# EAGLE board ONLY_HBRIDGE v9 (EAGLE 9.6.2)
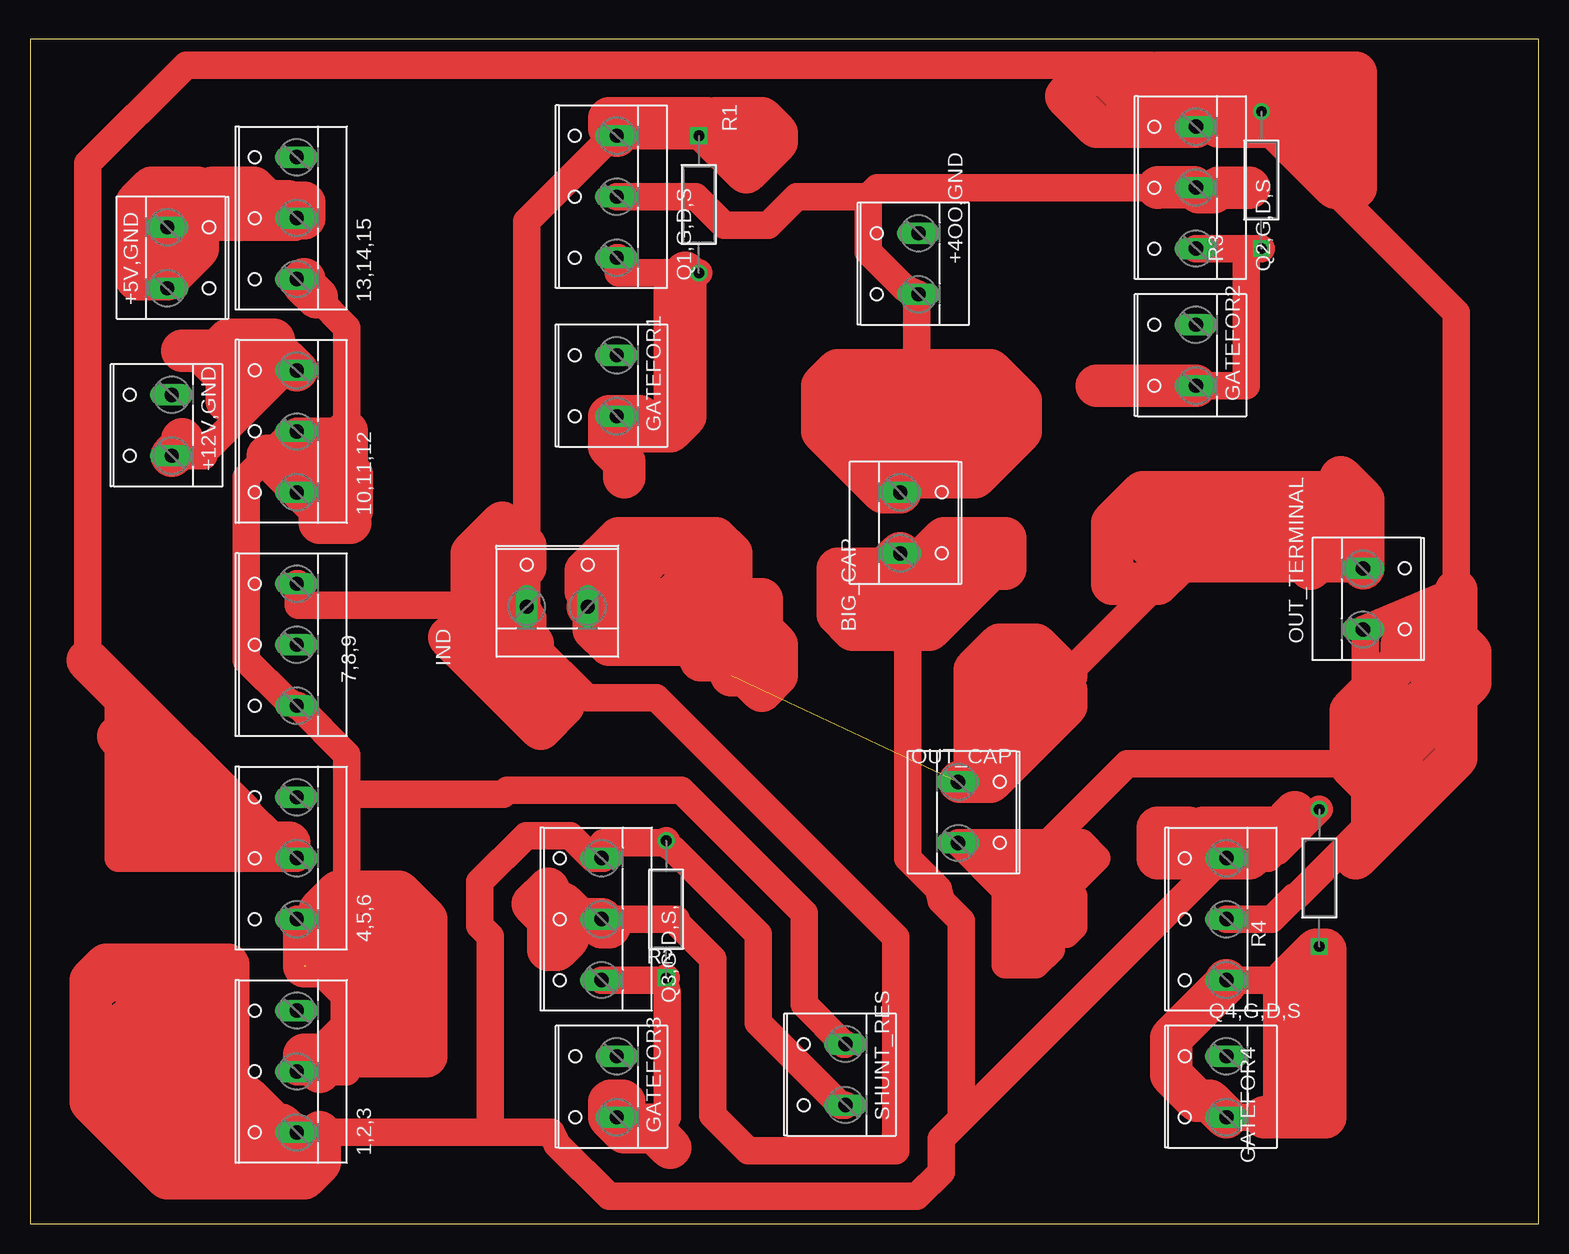
[diagram p0: board, top side]

Size 125.71 x 98.73 mm. Coordinates in mm from the lower left corner, seen from the top.
Outline: 0,0 125.71,0 125.71,98.73 0,98.73 0,0
Copper layers (1*16): Top 0.035mm / dielectric 1.5mm / Bottom 0.035mm
Design rules "Fusion Electronics Design Rules": minimum track width 90mil, minimum drill 0.35mm, track to track 0.5mm, track to pad 40mil, pad to pad 6mil, via to via 6mil, smd to smd 6mil, copper to edge 40mil, drill to drill 6mil, minimum pad ring 10mil, minimum via ring 8mil, stop-mask expansion 4mil, vias tented up to drill 9999mil, thermal gap 10mil

## Footprints (pad centres in the part's own frame; a part is rotated, then mirrored left to right if it is on the bottom)
W237-133 = drill 1.194 long: 1 -5.08,-0.635; 2 0,-0.635; 3 5.08,-0.635
W237-132 = drill 1.194 long: 1 -2.54,-0.635; 2 2.54,-0.635
STA_CF14_STP = drill 0.889 pad 1.397 square: 1 0,0 | drill 0.889 pad 1.397: 2 11.43,0

## Placement (x,y rotation side)
1,2,3  [W237-133]  21.59,12.7 90 top
4,5,6  [W237-133]  21.59,30.48 90 top
7,8,9  [W237-133]  21.59,48.26 90 top
10,11,12  [W237-133]  21.59,66.04 90 top
13,14,15  [W237-133]  21.59,83.82 90 top
+4OO,GND  [W237-132]  73.41,80.01 90 top
+5V,GND  [W237-132]  12.07,80.52 270 top
+12V,GND  [W237-132]  11.18,66.55 90 top
BIG_CAP  [W237-132]  73.15,58.42 270 top
GATEFOR1  [W237-132]  48.26,69.85 90 top
GATEFOR2  [W237-132]  96.52,72.39 90 top
GATEFOR3  [W237-132]  48.27,11.43 90 top
GATEFOR4  [W237-132]  99.06,11.43 90 top
IND  [W237-132]  43.94,52.07 0 top
OUT_CAP  [W237-132]  77.98,34.29 270 top
OUT_TERMINAL  [W237-132]  111.72,52.08 270 top
Q1,G,D,S  [W237-133]  48.26,85.6 90 top
Q2,G,D,S  [W237-133]  96.52,86.36 90 top
Q3,G,D,S,  [W237-133]  46.99,25.4 90 top
Q4,G,D,S  [W237-133]  99.06,25.4 90 top
R1  CF14JT10K0STA_CF14_STP  [STA_CF14_STP]  55.74,90.68 270 top
R2  CF14JT10K0STA_CF14_STP  [STA_CF14_STP]  53.02,20.5 90 top
R3  CF14JT10K0STA_CF14_STP  [STA_CF14_STP]  102.62,81.28 90 top
R4  CF14JT10K0STA_CF14_STP  [STA_CF14_STP]  107.44,23.11 90 top
SHUNT_RES  [W237-132]  67.31,12.45 90 top

## Library data of the parts
1,2,3 4,5,6 7,8,9 10,11,12 13,14,15 +4OO,GND +5V,GND +12V,GND BIG_CAP GATEFOR1-GATEFOR4 IND OUT_CAP OUT_TERMINAL Q1,G,D,S Q2,G,D,S Q3,G,D,S, Q4,G,D,S SHUNT_RES = con-wago-508
R1-R4 = 2024-12-04_14-13-54_Library; COPYRIGHT: Copyright (C) 2024 Ultra Librarian. All rights reserved.; MANUFACTURER_PART_NUMBER: CF14JT10K0; MFR_NAME: Stackpole International

## Nets
N$2: GATEFOR2.1 Q2,G,D,S.1 R3.1
N$3: 1,2,3.2 4,5,6.1 7,8,9.1 10,11,12.2 13,14,15.1 SHUNT_RES.2
N$5: GATEFOR3.1 Q3,G,D,S,.1 R2.1
N$6: 1,2,3.1 BIG_CAP.2 Q3,G,D,S,.3 Q4,G,D,S.3 R2.2 R4.2 SHUNT_RES.1
N$7: 13,14,15.2 +5V,GND.1
N$8: 10,11,12.3 +12V,GND.1
N$9: +4OO,GND.1 BIG_CAP.1 Q1,G,D,S.2 Q2,G,D,S.2
N$11: IND.2 OUT_CAP.1 OUT_TERMINAL.1
N$12: 4,5,6.2 OUT_CAP.2 OUT_TERMINAL.2 Q2,G,D,S.3 Q4,G,D,S.2 R3.2
N$13: GATEFOR1.1 Q1,G,D,S.1 R1.2
N$17: 7,8,9.3 IND.1 Q1,G,D,S.3 Q3,G,D,S,.2 R1.1
N$19: GATEFOR4.1 Q4,G,D,S.1 R4.1

## Tracks (layer width: path | path; a pad name or v marks a point on that pad's centre or on a via)
N$2
  Top 2.286: Q2,G,D,S.1 101.35,81.28 | 101.35,81.28 R3.1 | GATEFOR2.1 101.35,69.85 101.35,81.28
  Top 3.556: GATEFOR2.1 88.9,69.85
N$3  (1 unrouted)
  Top 2.286: 13,14,15.1 22.35,78.74 23.88,77.22 26.42,74.68 26.42,66.04 10,11,12.2 21.34,65.53 19.81,64.01 18.03,62.23 18.03,46.99 21.34,43.69 7,8,9.1 22.35,43.18 26.42,39.12 26.42,35.81 | 1,2,3.2 24.13,12.7 26.42,12.7 26.42,21.34 25.65,22.1 | 25.65,22.1 22.35,25.4 4,5,6.1 | 26.42,35.81 26.42,22.86 25.65,22.1 | SHUNT_RES.2 67.82,14.99 64.52,18.29 64.52,25.91 54.28,36.15 39.78,36.15 39.45,35.81 26.42,35.81
  Top 3.556: 24.13,12.7 25.4,13.97 33.02,13.97 33.02,25.4 30.75,27.67 25.67,27.67 24.13,26.13 24.13,25.4 22.86,24.13 22.86,21.59 22.98,21.47 | 22.86,21.47 24.65,21.47 26.81,19.31 26.81,18.04 | 22.86,14.09 24.65,14.09 26.81,16.25 26.81,18.04 | 26.81,18.04 29.09,20.32 30.48,20.32 30.48,16.51 29.21,16.51 27.94,17.78 27.94,24.13 30.48,24.13 30.48,21.59 | 19.81,64.01 23.5,60.32 | 23.5,60.32 24.13,59.69 24.13,58.42 26.67,58.42 | 26.42,66.04 26.42,62.88 | 26.42,62.88 26.81,62.49 26.81,59.43 26.23,58.86 | 24.65,64.65 24.53,64.77 21.59,64.77 21.59,64.65 24.65,64.65 | 24.65,64.65 26.42,62.88 | 23.5,60.32 23.5,61.59 24.13,62.23 | 23.88,77.22 22.86,78.23 22.86,78.74
N$5
  Top 2.286: Q3,G,D,S,.1 52.83,20.32 | 52.83,20.32 R2.1 | GATEFOR3.1 53.09,8.89 53.09,19.3 52.83,20.32
  Top 3.556: GATEFOR3.1 48.9,9.53 49.53,10.16 49.41,10.28 48.38,10.28 48.26,10.16 48.26,8.89 49.53,7.62 52.07,7.62 53.34,6.35
N$6
  Top 2.286: 77.6,8.76 75.95,7.11 75.95,4.32 73.91,2.29 48.26,2.29 43.94,6.6 43.43,7.62 38.35,7.62 | 77.6,8.76 98.81,29.97 Q4,G,D,S.3 103.2,30.48 103.79,31.07 103.97,31.07 R4.2 | BIG_CAP.2 73.15,55.88 73.15,30.48 75.69,27.94 75.95,26.92 77.6,25.27 77.6,8.76 | 52.83,31.75 47.75,31.75 47.75,30.48 Q3,G,D,S,.3 46.89,30.48 45.01,32.36 41.35,32.36 37.49,28.5 37.49,24.84 38.35,23.97 38.35,7.62 | 52.83,31.75 R2.2 | 38.35,7.62 24.13,7.62 1,2,3.1 | 52.83,31.75 53.59,31.24 60.71,24.13 60.71,16.74 67.54,9.91 SHUNT_RES.1 | 74.93,54.61 76.2,54.61 76.2,53.34 77.47,53.34 77.47,54.61 | 7.62,16.51 10.16,13.97 10.16,10.16 11.43,8.89 12.7,8.89 12.7,19.05
  Top 3.556: Q4,G,D,S.3 97.79,32.38 97.79,33.02 104.14,33.02 | 105.41,34.29 104.14,33.02 | 104.14,33.02 101.6,30.48 93.98,30.48 93.98,33.02 96.52,33.02 | 24.13,7.62 24.13,5.08 22.86,3.81 11.43,3.81 5.08,10.16 5.08,19.05 | 5.08,19.05 6.35,20.32 13.97,20.32 13.97,6.35 11.43,6.35 7.62,10.16 7.62,16.51 8.89,17.78 10.16,17.78 11.43,16.51 11.43,11.43 10.16,10.16 10.16,7.62 12.7,5.08 18.15,10.53 20.39,8.28 20.93,8.28 21.59,7.62 21.59,6.35 16.51,6.35 16.51,21.59 6.35,21.59 5.08,20.32 5.08,19.05 | BIG_CAP.2 71.25,54.61 67.31,54.61 67.31,50.8 68.58,49.53 74.93,49.53 80.01,54.61 81.28,54.61 81.28,57.15 76.2,57.15 74.93,55.88 74.93,54.61 69.85,54.61 68.58,53.34 69.85,52.07 74.93,52.07
N$7
  Top 2.286: 13.97,83.06 22.1,83.06 22.1,83.82 13,14,15.2
  Top 3.556: +5V,GND.1 13.97,85.59 13.97,86.36 10.16,86.36 8.89,85.09 8.89,78.74 11.43,78.74 | 11.43,78.74 13.97,81.28 13.97,83.06 | 11.43,78.74 11.43,80.01 10.16,81.28 15.24,86.36 18.65,86.36 19.8,85.21 21.47,85.21 21.59,85.09 22.86,85.09 22.86,83.82 16.51,83.82
N$8
  Top 2.286: +12V,GND.1 14.48,64.01 14.48,64.26 21.34,71.12 10,11,12.3
  Top 3.556: +12V,GND.1 12.7,64.9 12.7,65.4 | 10,11,12.3 20.32,73.03 | 20.32,73.03 20.32,73.66 16.51,73.66 15.63,72.78 14.23,72.78 | 14.23,72.78 12.7,72.78 | 14.23,72.78 16.4,70.62 16.4,68.58 | 20.32,73.03 20.32,72.39 17.78,69.85
N$9
  Top 2.286: 73.91,67.31 73.91,68.58 73.91,77.47 +4OO,GND.1 72.9,77.98 69.85,81.03 69.85,85.6 | Q2,G,D,S.2 93.98,86.36 70.61,86.36 69.85,85.6 | 69.85,85.6 63.91,85.6 61.52,83.21 57.86,83.21 55.47,85.6 Q1,G,D,S.2 | 78.74,68.58 77.47,67.31 77.47,66.04 74.93,63.5 72.39,63.5
  Top 3.556: BIG_CAP.1 71.12,60.96 66.04,66.04 66.04,69.85 67.31,71.12 80.01,71.12 82.55,68.58 82.55,66.04 78.72,62.21 73.68,62.21 72.39,63.5 | 72.39,63.5 69.85,66.04 68.58,66.04 67.31,67.31 67.31,68.58 72.64,68.58 73.91,67.31 | 73.91,68.58 78.74,68.58 80.01,67.31 80.01,66.04 76.2,62.23 74.93,62.23 | 72.39,63.5 72.39,66.04 76.2,66.04 76.2,63.5 | 93.98,86.36 94,86.38 96.97,86.38 97.39,85.96 98.66,85.96 99.06,86.36 101.6,86.36
N$11  (1 unrouted)
  Top 2.286: 86.36,45.72 93.98,53.34 | 95.25,54.61 106.68,54.61 111,54.61 OUT_TERMINAL.1 | 77.47,36.83 OUT_CAP.1
  Top 3.556: OUT_TERMINAL.1 111.08,58.42 | 111.08,58.42 111.08,60.37 110.49,60.96 | 110.49,60.96 109.22,62.23 | 110.49,60.96 92.71,60.96 91.44,59.69 | 91.44,59.69 90.17,58.42 90.17,53.34 93.98,53.34 | 93.98,53.34 95.25,54.61 | 91.44,59.69 95.25,59.69 | 95.25,59.69 106.68,59.69 109.22,57.15 106.68,54.61 | 111.08,58.42 108.88,56.22 | 108.88,56.22 108.54,55.88 93.98,55.88 92.71,57.15 95.25,59.69 | 108.88,56.22 97.45,56.22 95.25,58.42 93.98,57.15 93.98,53.34 | IND.2 46.99,51.94 46.99,52.07 53.34,52.07 55.88,54.61 54.61,55.88 52.07,55.88 50.8,54.61 46.99,54.61 46.99,49.53 48.26,48.26 54.61,48.26 55.88,49.53 | 55.88,49.53 55.88,50.8 58.42,53.34 58.42,55.88 57.15,57.15 49.06,57.15 46.33,54.42 46.33,52.73 49.53,49.53 55.88,49.53 | 55.88,49.53 55.88,46.99 59.69,46.99 60.96,48.26 59.69,49.53 58.42,49.53 58.42,52.07 60.96,52.07 60.96,49.53 62.23,48.26 62.23,45.72 60.96,44.45 59.69,45.72 58.42,45.72 | 77.47,36.83 78.74,36.83 | 78.74,36.83 80.01,36.83 86.36,43.18 86.36,44.45 83.82,46.99 81.28,46.99 81.28,43.18 | 81.28,43.18 81.28,41.91 80.01,40.64 79.38,41.27 81.28,43.18 | 81.28,43.18 82.55,44.45 83.82,44.45 83.82,43.18 | 78.74,36.83 78.74,46.19 80.81,48.26 83.82,48.26 86.36,45.72
N$12
  Top 2.286: 111.25,38.35 111.25,49.53 OUT_TERMINAL.2 118.87,52.81 118.87,75.95 103.12,91.69 R3.2 97.79,92.71 97.28,92.71 | 97.28,92.71 97.28,91.44 Q2,G,D,S.3 | 4,5,6.2 7.37,30.48 7.37,31.75 | 7.37,44.45 7.37,40.64 7.37,31.75 | 111.25,38.35 91.44,38.35 84.84,31.75 OUT_CAP.2 81.28,27.81 | Q4,G,D,S.2 103.48,25.4 105.36,27.28 105.53,27.28 111.25,33 111.25,38.35 | 4.83,46.99 4.83,88.39 13.01,96.57 93.42,96.57 97.28,92.71 | 81.28,27.81 81.28,21.59 83.82,21.59 85.09,22.86 85.09,29.21 83.82,30.48 82.55,30.48 | 82.55,30.48 81.28,30.48 81.28,27.81 | 82.55,30.48 82.55,22.86 83.82,22.86 83.82,27.94 87.63,31.75 88.9,30.48 86.36,27.94 86.99,27.3 86.99,24.77 86.36,24.13 | 7.37,31.75 11.43,31.75
  Top 3.556: 118.87,52.81 118.87,38.86 110.49,30.48 110.06,30.91 111.86,32.71 111.86,36.38 110.06,38.18 110.06,42.75 114.3,46.99 114.3,48.26 116.84,50.8 120.02,47.62 120.02,45.09 114.3,39.37 114.3,36.83 113.03,36.83 113.03,43.18 115.57,43.18 116.84,44.45 116.84,46.99 | 4.83,46.99 7.37,44.45 17.64,34.18 17.64,34.03 19.92,31.75 21.59,31.75 | 7.37,40.64 11.43,36.58 11.43,35.56 12.06,34.92 | 12.06,34.92 13.97,33.02 15.24,33.02 | 12.06,34.92 10.16,33.02 8.26,34.92 8.26,36.2 8.89,36.83 13.97,31.75 16.51,31.75 | Q2,G,D,S.3 88.9,91.44 86.36,93.98 88.32,95.94 89.48,95.94 91.44,93.98 93.98,93.98 93.98,95.94 110.49,95.94 110.49,86.36 108.75,86.36 106.66,88.45 | 105.41,92.71 104.14,92.71 102.87,93.98 99.06,93.98 97.79,92.71 99.08,91.42 102.89,91.42 | 105.41,92.71 106.68,92.71 107.95,91.44 108.58,92.08 108.58,93.34 107.95,93.98 106.68,93.98 105.41,92.71 | 105.41,92.71 105.41,90.17 106.68,88.9 107.95,88.9 107.5,88.45 106.66,88.45 | 106.66,88.45 103.69,91.42 102.89,91.42 | 102.89,91.42 102.87,91.44
N$13
  Top 2.286: 53.09,79.25 49.02,79.25 49.02,80.52 Q1,G,D,S.1 | 53.09,79.25 54.61,79.25 R1.2 | GATEFOR1.1 50.8,67.31 53.09,67.31 53.09,79.25
  Top 3.556: 54.61,79.25 54.61,67.31 53.34,66.04 48.26,66.04 | 48.26,66.04 48.26,67.31 50.8,67.31 | 49.53,62.23 49.53,63.5 48.26,64.77 48.26,66.04
N$17
  Top 2.286: R1.1 Q1,G,D,S.3 48.01,90.17 41.4,83.57 IND.1 | 36.83,51.56 22.35,51.56 22.35,53.34 7,8,9.3 | 38.1,51.56 41.4,51.56 IND.1 | Q3,G,D,S,.2 53.85,25.4 53.85,25.15 56.9,22.1 56.9,9.05 59.85,6.1 72.14,6.1 72.14,23.88 52.17,43.84 46.43,43.84 41.91,48.36 41.91,50.55 IND.1
  Top 3.556: Q1,G,D,S.3 48.26,91.31 48.26,92.15 56.44,92.15 57.15,91.44 56.52,90.81 57.15,90.17 | 57.15,90.17 59.69,87.63 62.23,90.17 62.23,90.88 60.96,92.15 57.15,92.15 57.15,90.17 | 57.15,90.17 59.69,90.17 59.69,88.9 | 36.83,51.56 36.83,54.61 | 36.83,54.61 36.83,55.88 39.37,58.42 41.27,56.51 41.27,54.74 38.1,51.56 | 36.83,54.61 38.1,55.88 39.37,55.88 | 41.91,48.36 41.81,48.26 40.64,48.26 | 40.64,48.26 39.37,48.26 | 39.37,48.26 38.1,49.53 39.37,50.8 40.64,50.8 40.64,48.26 | 39.37,48.26 44.45,43.18 42.55,41.27 34.92,48.9 | 48.26,24.74 47.62,24.74 Q3,G,D,S,.2 45.72,25.4 44.45,26.67 43.18,25.4 43.18,22.86 43.91,22.86 44.18,23.13 44.82,23.76 41.91,26.67 43.18,27.94
N$19
  Top 2.286: R4.1 104.65,20.32 103.89,20.32 | Q4,G,D,S.1 103.89,20.32 | GATEFOR4.1 102.87,8.89 103.89,8.89 103.89,20.32
  Top 3.556: Q4,G,D,S.1 99.69,20.08 95.11,15.5 95.11,12.44 97.27,10.28 98.3,10.28 GATEFOR4.1 | 102.87,8.89 105.41,8.89 | 105.41,8.89 107.95,8.89 107.95,22.86 107.19,22.86 104.65,20.32 | 105.41,8.89 105.41,19.05